# Altium PCB Sensor_Glove-X01.PcbDoc (part 3 of 4)
Units mm, origin at the board's own origin, x right, y up, seen from the top; angles counter-clockwise.
Board outline 58.67 x 37.59 mm, 2 copper layers (Top Layer, Bottom Layer), stack 1.711 mm thick; 126 components, 71 nets, 384 pads, 113 vias.
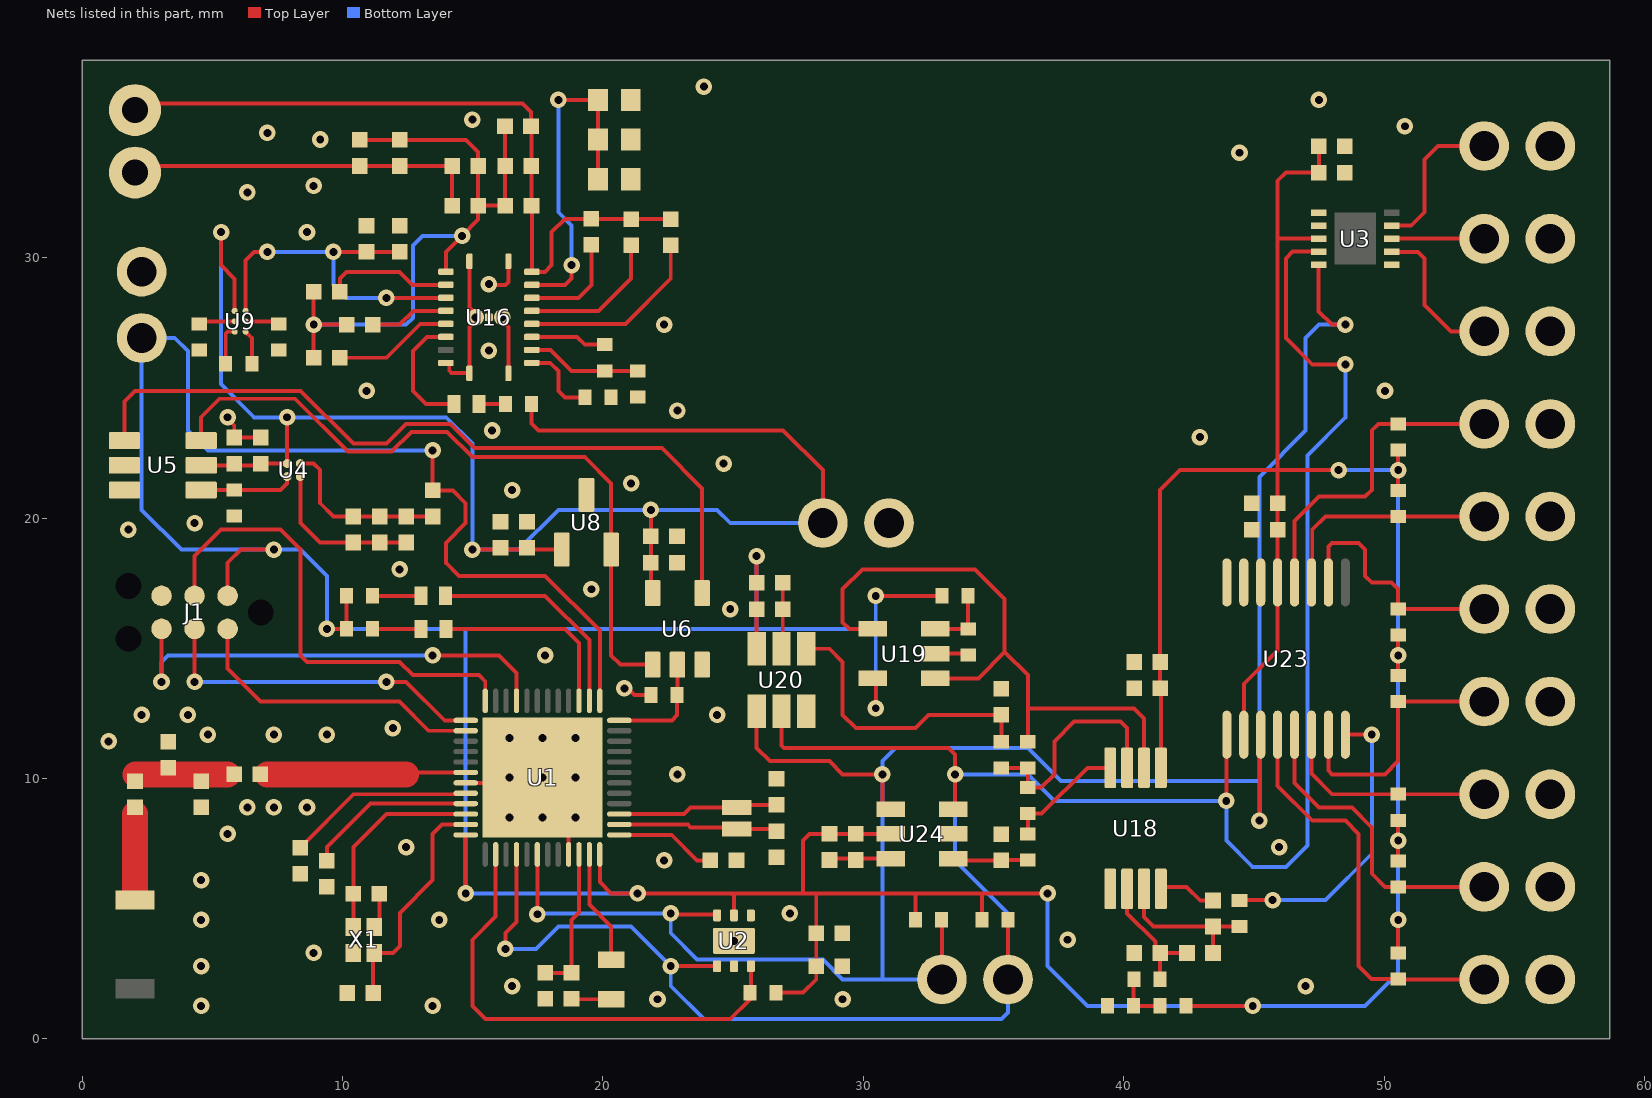
[diagram p2: the nets of this part, all layers, seen from the top]

## Part data (continued)
R24 R32 R36 R37: library part R-0402(1005), "Fixed Resistor, Metal Glaze/thick Film, 0.0625W, 0ohm, Surface Mount, 0402", Case Code (Imperial)=0402, Case Code (Metric)=1005, Manufacturer=Yageo, Manufacturer Part Number=AC0402JR-070RL, Max Operating Temperature=155°C, Max Power Dissipation=63mW, Min Operating Temperature=-55°C, Package Quantity=1, Power Rating=62.5mW, Resistor Type="Thick Film", Supplier Part Number 1=311-0.0LBCT-ND, Temperature Coefficient=200ppm/°C, Tolerance=5%, Voltage Rating=50V, Case/Package=0402, Category="Chip SMD Resistors", ComponentLink1Description=https://datasheet.ciiva.com:443/pdfs/VipMasterIC/IC/YAGO/YAGO-S-A0003597364/YAGO-S-A0003597364-1.pdf?src-supplier=IHS+Markit, ComponentLink1URL=https://datasheet.ciiva.com:443/pdfs/VipMasterIC/IC/YAGO/YAGO-S-A0003597364/YAGO-S-A0003597364-1.pdf?src-supplier=IHS+Markit, ComponentLink2Description=http://www.mouser.com/ds/2/447/yageodocoutput-1111992.pdf?src-supplier=Mouser, ComponentLink2URL=http://www.mouser.com/ds/2/447/yageodocoutput-1111992.pdf?src-supplier=Mouser, ComponentLink3Description=http://www.yageo.com/NewPortal/yageodocoutput?fileName=/pdf/R-Chip/PYu-AC_51_RoHS_L_6.pdf&src-supplier=Digi-Key, ComponentLink3URL=http://www.yageo.com/NewPortal/yageodocoutput?fileName=/pdf/R-Chip/PYu-AC_51_RoHS_L_6.pdf&src-supplier=Digi-Key, ComponentLink4Description=http://www.yageo.com/documents/recent/PYu-AC_51_RoHS_L_2_revised.pdf?src-supplier=Future+Electronics, ComponentLink4URL=http://www.yageo.com/documents/recent/PYu-AC_51_RoHS_L_2_revised.pdf?src-supplier=Future+Electronics, Features="Moisture Resistant,Automotive AEC-Q200,Anti-Sulfur", Height=0.015inch, Lead Free="Lead Free", Length=0.039inch, Number of Terminations=2, Packaging="Tape and Reel", Pricing 1="1=0.10000, 10=0.01900, 25=0.01400, 50=0.01080, 100=0.00790, 250=0.00604, 500=0.00482, 1000=0.00355, 5000=0.00255 (USD)", Resistance=0mR, RoHS=Yes, Stock 1=1100119, Supplier 1=Digi-Key, Termination=SMD/SMT, Width=0.02inch
R33 R35: library part R-0402(1005), "Fixed Resistor, Metal Glaze/thick Film, 0.0625W, 100000ohm, 50V, 1% +/-Tol, 100ppm/Cel, Surface Mount, 0402", Case Code (Imperial)=0402, Case Code (Metric)=1005, Manufacturer=Yageo, Manufacturer Part Number=AC0402FR-07100KL, Max Operating Temperature=155°C, Max Power Dissipation=63mW, Min Operating Temperature=-55°C, Power Rating=62.5mW, Resistor Type="Thick Film", Supplier Part Number 1=YAG3434CT-ND, Temperature Coefficient=100ppm/°C, Tolerance=1%, Voltage Rating=50V, Case/Package=0402, Category="Chip SMD Resistors", ComponentLink1Description=https://datasheet.ciiva.com:443/pdfs/VipMasterIC/IC/YAGO/YAGO-S-A0003597364/YAGO-S-A0003597364-1.pdf?src-supplier=IHS+Markit, ComponentLink1URL=https://datasheet.ciiva.com:443/pdfs/VipMasterIC/IC/YAGO/YAGO-S-A0003597364/YAGO-S-A0003597364-1.pdf?src-supplier=IHS+Markit, ComponentLink2Description=http://components.arrow.com/part/dataview/0323_03348509?src-supplier=Arrow+Europe, ComponentLink2URL=http://components.arrow.com/part/dataview/0323_03348509?src-supplier=Arrow+Europe, ComponentLink3Description=http://www.yageo.com/NewPortal/yageodocoutput?fileName=/pdf/R-Chip/PYu-AC_51_RoHS_L_6.pdf&src-supplier=Digi-Key, ComponentLink3URL=http://www.yageo.com/NewPortal/yageodocoutput?fileName=/pdf/R-Chip/PYu-AC_51_RoHS_L_6.pdf&src-supplier=Digi-Key, ComponentLink4Description=http://www.yageo.com/documents/recent/PYu-AC_51_RoHS_L_2.pdf?src-supplier=Mouser, ComponentLink4URL=http://www.yageo.com/documents/recent/PYu-AC_51_RoHS_L_2.pdf?src-supplier=Mouser, ComponentLink5Description=http://www.yageo.com/documents/recent/PYu-AC_51_RoHS_L_2_revised.pdf?src-supplier=Future+Electronics, ComponentLink5URL=http://www.yageo.com/documents/recent/PYu-AC_51_RoHS_L_2_revised.pdf?src-supplier=Future+Electronics, Depth=0.5mm, Features="Moisture Resistant,Automotive AEC-Q200", Height=0.015inch, Lead Free="Lead Free", Length=1mm, Military Standard=Not, Number of Terminations=2, Packaging="Tape and Reel", Pricing 1="1=0.10000, 10=0.02000, 100=0.00830, 1000=0.00374, 2500=0.00324, 5000=0.00268 (USD)", Resistance=100kR, RoHS=Yes, Stock 1=239006, Supplier 1=Digi-Key, Termination=SMD/SMT, Width=0.02inch
TP1 TP2 TP3 TP4 TP5 TP6 TP7 TP8 TP9 TP25 TP37 TP45: "SHUNT LP W/HANDLE 2 POS 30AU", Color=Black, Contact Current Rating=3A, Contact Resistance=15mR, Flammability Rating="UL94 V-0", Manufacturer="TE Connectivity", Manufacturer Part Number=8815452, Max Operating Temperature=105°C, Min Operating Temperature=-65°C, Package Quantity=14000, Supplier Part Number 1=A26242-ND, Approvals=UL,CSA, Category="Headers and Wire Housings", ComponentLink1Description=https://datasheet.ciiva.com/1455/92946-1455888.pdf?src-supplier=Newark, ComponentLink1URL=https://datasheet.ciiva.com/1455/92946-1455888.pdf?src-supplier=Newark, ComponentLink2Description=https://datasheet.ciiva.com/19459/841467-19459897.pdf?src-supplier=Jameco, ComponentLink2URL=https://datasheet.ciiva.com/19459/841467-19459897.pdf?src-supplier=Jameco, ComponentLink3Description=https://datasheet.ciiva.com/15174/getdatasheetpartid-155768-15174939.pdf?src-supplier=Verical, ComponentLink3URL=https://datasheet.ciiva.com/15174/getdatasheetpartid-155768-15174939.pdf?src-supplier=Verical, ComponentLink4Description=https://datasheet.ciiva.com/11754/0900766b80da19e8-11754990.pdf?src-supplier=RSComponents, ComponentLink4URL=https://datasheet.ciiva.com/11754/0900766b80da19e8-11754990.pdf?src-supplier=RSComponents, ComponentLink5Description=https://datasheet.ciiva.com/30154/eng-cs-1307819-section-6-7and8-0808-30154293.pdf?src-supplier=Onlinecomponents.com, ComponentLink5URL=https://datasheet.ciiva.com/30154/eng-cs-1307819-section-6-7and8-0808-30154293.pdf?src-supplier=Onlinecomponents.com, ComponentLink6Description=https://datasheet.ciiva.com/767/eng-cd-881545-k3-767850.pdf?src-supplier=Digi-Key, ComponentLink6URL=https://datasheet.ciiva.com/767/eng-cd-881545-k3-767850.pdf?src-supplier=Digi-Key, ComponentLink7Description=https://datasheet.ciiva.com/3120/eng-cs-1307819-section-6-7and8-0808-3120202.pdf?src-supplier=Avnet, ComponentLink7URL=https://datasheet.ciiva.com/3120/eng-cs-1307819-section-6-7and8-0808-3120202.pdf?src-supplier=Avnet, Contact Gender=Female, Contact Material=Bronze, Contact Plating=Gold, Current Rating=3A, Depth=10.9mm, Gender=Female, Height=10.9mm, Housing Color=Black, Housing Material=Thermoplastic, Length=5.08mm, Number of Contacts=2, Number of Positions=2, Number of Rows=1, Orientation=Straight, Packaging=Bag, Pitch=2.54mm, Pricing 1="1=0.280000, 10=0.262000, 25=0.223600, 50=0.195600, 100=0.181700, 250=0.160760, 500=0.153760, 1000=0.125800, 2500=0.115320 (USD)", Radiation Hardening=No, REACH SVHC="No SVHC", RoHS=Yes, Stock 1=2099, Supplier 1=Digi-Key, Termination=Solder, Width=2.5mm
U1: library part NRSC-NRF52832-QF-48, "Multiprotocol Bluetooth Smart, ANT/ANT+ and Proprietary System-on-Chip, 2.4 GHz, 256 KB FLASH, 1.7 to 3.6 V, -40 to 85 degC, 48-Pin QFN, RoHS, Tape and Reel", Current - Receiving=5.4mA, Current - Transmitting=7.5mA, Frequency=2.4GHz, Manufacturer="Nordic Semiconductor", Supplier Part Number 1=1490-1067-1-ND, Category="RF Receivers, Transceivers", ComponentLink1Description=https://datasheet.ciiva.com:443/pdfs/VipMasterIC/IC/NRSA/NRSA-S-A0002414264/NRSA-S-A0002414264-1.pdf?src-supplier=IHS+Markit, ComponentLink1URL=https://datasheet.ciiva.com:443/pdfs/VipMasterIC/IC/NRSA/NRSA-S-A0002414264/NRSA-S-A0002414264-1.pdf?src-supplier=IHS+Markit, ComponentLink5Description=http://infocenter.nordicsemi.com/pdf/nRF52832_PB_v1.7.pdf?src-supplier=Digi-Key, ComponentLink5URL=http://infocenter.nordicsemi.com/pdf/nRF52832_PB_v1.7.pdf?src-supplier=Digi-Key, ComponentLink6Description=http://infocenter.nordicsemi.com/pdf/nRF52832_PS_v1.4.pdf?src-supplier=Digi-Key, ComponentLink6URL=http://infocenter.nordicsemi.com/pdf/nRF52832_PS_v1.4.pdf?src-supplier=Digi-Key, Data Rate=2Mbps, Interface=SPI,UART, Manufacturer Part Number=NRF52832-QFAA-R7, Memory Size=64KB, Number of GPIO=32, Packaging="Tape and Reel", Pricing 1="1=5.46000, 10=4.87500, 25=4.38760, 100=3.99750, 250=3.60752, 500=3.23700 (USD)", RoHS=No, Sensitivity=-96dBm, Stock 1=7487, Supplier 1=Digi-Key
U2: library part bceab6869a9cb85cf5675529ee35ce4, "TEMPERATURE SENSOR", Ambient Temperature Range High=+150°C, Ambient Temperature Range Low=-55°C, Manufacturer="Texas Instruments", Max Operating Temperature=150°C, Max Supply Voltage=5.5V, Min Supply Voltage=1.8V, Operating Supply Current=3.5-16uA, Package=DRV0006A, Supplier Part Number 1=296-51834-1-ND, Temperature="-55°C to +150°C", Automotive=No, Category=IC, ComponentLink1Description=https://www.ti.com:443/lit/ds/symlink/tmp117.pdf?src-supplier=IHS+Markit, ComponentLink1URL=https://www.ti.com:443/lit/ds/symlink/tmp117.pdf?src-supplier=IHS+Markit, ComponentLink2Description=Datasheet, ComponentLink2URL=http://www.ti.com/lit/ds/symlink/tmp117.pdf, ComponentLink3Description=http://www.ti.com/lit/gpn/tmp117?src-supplier=Digi-Key, ComponentLink3URL=http://www.ti.com/lit/gpn/tmp117?src-supplier=Digi-Key, Device Class L1=Sensors, Device Class L2="Temperature and Humidity Sensors", Device Class L3=unset, Digikey Description="TEMPERATURE SENSOR", Height=0.8mm, Interface=I2C,2-Wire,SMBus, Ipc Land Pattern Name=DFN200X200X80-6, Lead Free=Yes, Manufacturer Part Number=TMP117AIDRVR, Max Junction Temp=+150°C, Min Operating Temperature=-55°C, Mount="Surface Mount", Octopart=https://octopart.com/tmp117aidrvr-texas+instruments-95511044, Output Type=I2C, Packaging="Cut Tape", Pricing 1="1=8.02000, 5=7.07600, 10=6.25000, 25=5.07040, 50=4.48100, 100=4.36300, 500=3.65552, 1000=3.41968 (USD)", Resolution=16bits, RoHS=TRUE, Standoff Height=0mm, Stock 1=3558, Supplier 1=Digi-Key, Temperature Range High=+150°C, Temperature Range Low=-55°C
U3: library part FDC1004, "Analog Circuit, 1 Func, 4 Channel, PDSO10", Manufacturer="Texas Instruments", Manufacturer Part Number=FDC1004DSCR, Max Operating Temperature=125°C, Min Operating Temperature=-40°C, Supplier Part Number 1=296-46090-1-ND, Category="Integrated Circuits (ICs)", ComponentLink1Description=https://www.ti.com:443/lit/ds/symlink/fdc1004.pdf?src-supplier=IHS+Markit, ComponentLink1URL=https://www.ti.com:443/lit/ds/symlink/fdc1004.pdf?src-supplier=IHS+Markit, ComponentLink2Description=https://datasheet.ciiva.com/48512/fdc1004-48512055.pdf?src-supplier=Avnet, ComponentLink2URL=https://datasheet.ciiva.com/48512/fdc1004-48512055.pdf?src-supplier=Avnet, Interface=I2C, Lead Free="Lead Free", Number of Inputs=4, Number of Pins=10, Packaging="Tape and Reel", Pricing 1="1=7.13000, 5=6.25000, 10=5.62500, 25=5.00000, 50=4.62500, 100=4.00000, 500=3.75000 (USD)", Radiation Hardening=No, RoHS=Yes, Stock 1=1027, Supplier 1=Digi-Key
U4: library part ADP160-3_3V, "Fixed Positive LDO Regulator, 3.3V, 0.195V Dropout, CMOS, PBGA4", Dropout Voltage=105mV, Manufacturer="Analog Devices", Manufacturer Part Number=ADP160ACBZ-3.3-R7, Max Input Voltage=5.5V, Max Operating Temperature=125°C, Max Output Current=150mA, Max Output Voltage=4.2V, Max Supply Current=42uA, Min Current Limit=220mA, Min Input Voltage=2.2V, Min Operating Temperature=-40°C, Min Output Voltage=1.2V, Nominal Output Voltage=3.3V, Output Voltage Accuracy=2%, Package Quantity=3000, Power Supply Rejection Ratio (PSRR)=60dB, Supplier Part Number 1=ADP160ACBZ-3.3-R7CT-ND, Accuracy=2%, Category="Voltage Regulators - Linear", ComponentLink1Description=https://datasheet.ciiva.com:443/pdfs/VipMasterIC/IC/ANDI/ANDI-S-A0005865400/ANDI-S-A0005865400-1.pdf?src-supplier=IHS+Markit, ComponentLink1URL=https://datasheet.ciiva.com:443/pdfs/VipMasterIC/IC/ANDI/ANDI-S-A0005865400/ANDI-S-A0005865400-1.pdf?src-supplier=IHS+Markit, ComponentLink2Description=https://datasheet.ciiva.com/15271/adp160-161-162-163-15271721.pdf?src-supplier=Arrow+Europe, ComponentLink2URL=https://datasheet.ciiva.com/15271/adp160-161-162-163-15271721.pdf?src-supplier=Arrow+Europe, ComponentLink3Description=https://datasheet.ciiva.com/8242/adp160-161-162-163-8242024.pdf?src-supplier=Avnet, ComponentLink3URL=https://datasheet.ciiva.com/8242/adp160-161-162-163-8242024.pdf?src-supplier=Avnet, ComponentLink4Description=https://datasheet.ciiva.com/18552/adp160-161-162-163-18552347.pdf?src-supplier=Digi-Key, ComponentLink4URL=https://datasheet.ciiva.com/18552/adp160-161-162-163-18552347.pdf?src-supplier=Digi-Key, ComponentLink5Description=https://datasheet.ciiva.com/18552/adp160-161-162-163-18552348.pdf?src-supplier=Digi-Key, ComponentLink5URL=https://datasheet.ciiva.com/18552/adp160-161-162-163-18552348.pdf?src-supplier=Digi-Key, ComponentLink6Description=https://datasheet.ciiva.com/18552/adp160-161-162-163-18552349.pdf?src-supplier=Digi-Key, ComponentLink6URL=https://datasheet.ciiva.com/18552/adp160-161-162-163-18552349.pdf?src-supplier=Digi-Key, Lead Free="Contains Lead", Mount="Surface Mount", Nominal Supply Current=42uA, Number of Outputs=1, Number of Pins=4, Number of Regulators=1, Operating Supply Current=42uA, Output Current=150mA, Output Type=Fixed, Output Voltage=3.3V, Packaging="Tape and Reel", Polarity=Positive, Pricing 1="1=1.12000, 10=1.00300, 25=0.95200, 100=0.73100, 250=0.64600, 500=0.61200, 1000=0.49300 (USD)", Radiation Hardening=No, REACH SVHC="No SVHC", RoHS=Yes, Supplier 1=Digi-Key
U5: library part CMP-0859-00228-3, "CONFIGURABLE MULTIPLE-FUNCTION GATE, DBV0006A, LARGE T&R", Case/Package=SOT-23, High Level Output Current=-32mA, Low Level Output Current=32mA, Manufacturer="Texas Instruments", Max Operating Temperature=125°C, Max Supply Voltage=5.5V, Min Operating Temperature=-40°C, Min Supply Voltage=1.65V, Package Quantity=3000, Quiescent Current=10uA, Supplier Part Number 1=296-15574-1-ND, Category="Logic Gates", ComponentLink1Description=https://www.ti.com:443/lit/ds/symlink/sn74lvc1g57.pdf?src-supplier=IHS+Markit, ComponentLink1URL=https://www.ti.com:443/lit/ds/symlink/sn74lvc1g57.pdf?src-supplier=IHS+Markit, ComponentLink2Description=https://datasheet.ciiva.com/15090/getdatasheetpartid-173082-15090973.pdf?src-supplier=Verical, ComponentLink2URL=https://datasheet.ciiva.com/15090/getdatasheetpartid-173082-15090973.pdf?src-supplier=Verical, ComponentLink3Description=https://datasheet.ciiva.com/1880/sn74lvc1g57-1880083.pdf?src-supplier=Digi-Key, ComponentLink3URL=https://datasheet.ciiva.com/1880/sn74lvc1g57-1880083.pdf?src-supplier=Digi-Key, ComponentLink4Description=https://datasheet.ciiva.com/1880/sn74lvc1g57-1880084.pdf?src-supplier=Digi-Key, ComponentLink4URL=https://datasheet.ciiva.com/1880/sn74lvc1g57-1880084.pdf?src-supplier=Digi-Key, ComponentLink5Description=https://datasheet.ciiva.com/46395/1882763-46395382.pdf?src-supplier=Element14, ComponentLink5URL=https://datasheet.ciiva.com/46395/1882763-46395382.pdf?src-supplier=Element14, ComponentLink6Description=https://datasheet.ciiva.com/46439/1834192-46439175.pdf?src-supplier=Element14, ComponentLink6URL=https://datasheet.ciiva.com/46439/1834192-46439175.pdf?src-supplier=Element14, ComponentLink7Description=https://datasheet.ciiva.com/7783/1771418-7783483.pdf?src-supplier=Element14, ComponentLink7URL=https://datasheet.ciiva.com/7783/1771418-7783483.pdf?src-supplier=Element14, ComponentLink8Description=https://datasheet.ciiva.com/7783/1771418-7783484.pdf?src-supplier=Element14, ComponentLink8URL=https://datasheet.ciiva.com/7783/1771418-7783484.pdf?src-supplier=Element14, ComponentLink9Description=https://datasheet.ciiva.com/1880/sn74lvc1g57-1880082.pdf?src-supplier=Digi-Key, ComponentLink9URL=https://datasheet.ciiva.com/1880/sn74lvc1g57-1880082.pdf?src-supplier=Digi-Key, ComponentLink10Description=https://datasheet.ciiva.com/48702/001075107-da-01-en-ic-mult-fun-sn74lvc1g57dbvr-sot-23-6-tid-48702374.pdf?src-supplier=Conrad, ComponentLink10URL=https://datasheet.ciiva.com/48702/001075107-da-01-en-ic-mult-fun-sn74lvc1g57dbvr-sot-23-6-tid-48702374.pdf?src-supplier=Conrad, Contact Plating=Gold, Height=1.3mm, Lead Free="Lead Free", Length=3.05mm, Logic Function="NAND GATE,AND GATE,NOR GATE,OR GATE,Inverter,Multi Function", Manufacturer Part Number=SN74LVC1G57DBVR, Max Output Current=32mA, Mount="Surface Mount", Number of Bits=1, Number of Circuits=1, Number of Elements=1, Number of Gates=1, Number of Input Lines=2, Number of Inputs=3, Number of Output Lines=1, Number of Outputs=1, Number of Pins=6, Output Current=32mA, Packaging="Tape and Reel", Pricing 1="1=0.37000, 10=0.28100, 25=0.25320, 100=0.17480, 250=0.14720, 500=0.11960, 1000=0.09200 (USD)", Propagation Delay=6.3ns, Radiation Hardening=No, REACH SVHC="No SVHC", RoHS=Yes, Schmitt Trigger Input=Yes, Stock 1=11185, Supplier 1=Digi-Key, Termination=SMD/SMT, Turn-On Delay Time=6.1ns, Weight=0.000229oz, Width=1.75mm
U6: library part CMP-0859-00176-3, "Single Positive-Edge-Triggered D-Type Flip-Flop, DBV0005A, LARGE T&R", Case/Package=SOT-23, Frequency=160MHz, High Level Output Current=-32mA, Low Level Output Current=32mA, Manufacturer="Texas Instruments", Max Operating Temperature=125°C, Max Supply Voltage=5.5V, Min Operating Temperature=-40°C, Min Supply Voltage=1.65V, Package Quantity=3000, Supplier Part Number 1=296-9851-1-ND, Category="Latches and Flip Flops", Clock Edge Trigger Type="Positive Edge", ComponentLink1Description=https://www.ti.com:443/lit/ds/symlink/sn74lvc1g80.pdf?src-supplier=IHS+Markit, ComponentLink1URL=https://www.ti.com:443/lit/ds/symlink/sn74lvc1g80.pdf?src-supplier=IHS+Markit, ComponentLink2Description=https://datasheet.ciiva.com/15091/getdatasheetpartid-71921-15091286.pdf?src-supplier=Verical, ComponentLink2URL=https://datasheet.ciiva.com/15091/getdatasheetpartid-71921-15091286.pdf?src-supplier=Verical, ComponentLink3Description=https://datasheet.ciiva.com/1854/sn74lvc1g80-1854761.pdf?src-supplier=Digi-Key, ComponentLink3URL=https://datasheet.ciiva.com/1854/sn74lvc1g80-1854761.pdf?src-supplier=Digi-Key, ComponentLink4Description=https://datasheet.ciiva.com/46395/1882705-46395835.pdf?src-supplier=Element14, ComponentLink4URL=https://datasheet.ciiva.com/46395/1882705-46395835.pdf?src-supplier=Element14, ComponentLink5Description=https://datasheet.ciiva.com/1854/sn74lvc1g80-1854762.pdf?src-supplier=Digi-Key, ComponentLink5URL=https://datasheet.ciiva.com/1854/sn74lvc1g80-1854762.pdf?src-supplier=Digi-Key, ComponentLink6Description=https://datasheet.ciiva.com/8055/1831218-8055610.pdf?src-supplier=Element14, ComponentLink6URL=https://datasheet.ciiva.com/8055/1831218-8055610.pdf?src-supplier=Element14, ComponentLink7Description=https://datasheet.ciiva.com/1854/sn74lvc1g80-1854763.pdf?src-supplier=Digi-Key, ComponentLink7URL=https://datasheet.ciiva.com/1854/sn74lvc1g80-1854763.pdf?src-supplier=Digi-Key, Lead Free="Lead Free", Logic Function=D-Type,Flip-Flop, Manufacturer Part Number=SN74LVC1G80DBVR, Max Frequency=160MHz, Mount="Surface Mount", Number of Bits=1, Number of Bits per Element=1, Number of Circuits=1, Number of Elements=1, Number of Gates=1, Number of Input Lines=1, Number of Output Lines=1, Number of Pins=5, Output Current=32mA, Packaging="Tape and Reel", Polarity=Inverting, Pricing 1="1=0.32000, 10=0.24000, 25=0.21000, 100=0.13590, 250=0.11252, 500=0.09000, 1000=0.06900 (USD)", Propagation Delay=9.9ns, Radiation Hardening=No, REACH SVHC="No SVHC", RoHS=Yes, Stock 1=12348, Supplier 1=Digi-Key, Turn-On Delay Time=1.1ns, Weight=0.000557oz
U8: library part CMP-04937-000003-1, "LP HALL 32FBDBZR", Case/Package=TO-236-3, Manufacturer="Texas Instruments", Max Operating Temperature=85°C, Max Output Current=5mA, Max Supply Current=2.6mA, Min Operating Temperature=-40°C, Supplier Part Number 1=296-47323-1-ND, Category="Integrated Circuits (ICs)", ComponentLink1Description=https://www.ti.com:443/lit/ds/symlink/drv5032.pdf?src-supplier=IHS+Markit, ComponentLink1URL=https://www.ti.com:443/lit/ds/symlink/drv5032.pdf?src-supplier=IHS+Markit, ComponentLink2Description=Datasheet, ComponentLink2URL=http://www.ti.com/lit/ds/symlink/drv5032.pdf, ComponentLink3Description=http://www.ti.com/lit/ds/symlink/drv5032.pdf?src-supplier=Digi-Key, ComponentLink3URL=http://www.ti.com/lit/ds/symlink/drv5032.pdf?src-supplier=Digi-Key, ComponentLink4Description=http://www.ti.com/general/docs/suppproductinfo.tsp?distId=10&amp;gotoUrl=http%3A%2F%2Fwww.ti.com%2Flit%2Fgpn%2Fdrv5032&src-supplier=Digi-Key, ComponentLink4URL=http://www.ti.com/general/docs/suppproductinfo.tsp?distId=10&amp;gotoUrl=http%3A%2F%2Fwww.ti.com%2Flit%2Fgpn%2Fdrv5032&src-supplier=Digi-Key, Manufacturer Part Number=DRV5032FBDBZR, Packaging="Cut Tape", Pricing 1="1=0.80000, 5=0.76600, 10=0.66600, 25=0.58520, 50=0.48600, 100=0.41400, 500=0.36000, 1000=0.31500 (USD)", RoHS=No, Sensing Method="Hall Effect", Stock 1=6326, Supplier 1=Digi-Key
U9: "Power Supply Support Circuit", Battery Pack Voltage=4.2V, Manufacturer="Texas Instruments", Max Charge Current=250mA, Max Operating Temperature=85°C, Max Supply Voltage=6.45V, Min Operating Temperature=-40°C, Min Supply Voltage=3.5V, Operating Supply Current=75nA, Output Voltage=4.35V, Package Quantity=250, Supplier Part Number 1=296-38373-1-ND, Category="Batteries and Accessories", ComponentLink1Description=https://www.ti.com:443/lit/ds/symlink/bq25100.pdf?src-supplier=IHS+Markit, ComponentLink1URL=https://www.ti.com:443/lit/ds/symlink/bq25100.pdf?src-supplier=IHS+Markit, ComponentLink2Description=https://datasheet.ciiva.com/46404/1854517-46404758.pdf?src-supplier=Element14, ComponentLink2URL=https://datasheet.ciiva.com/46404/1854517-46404758.pdf?src-supplier=Element14, Contact Plating=Copper,Tin,Silver, Fault Protection="Over Voltage,Over Temperature,Short Circuit", Lead Free="Lead Free", Manufacturer Part Number=BQ25100YFPT, Mount="Surface Mount", Number of Cells=1, Number of Pins=6, Output Current=250mA, Packaging="Tape and Reel", Pricing 1="1=2.24000, 10=2.01100, 25=1.89760, 100=1.51800 (USD)", REACH SVHC="No SVHC", RoHS=Yes, Stock 1=3049, Supplier 1=Digi-Key, Weight=6E-05oz
U16: library part TI-BQ51013B-RHL20, "WPC 1.1 Compatible Fully Integrated Wireless Power Receiver IC, 4 V Min Input, 20-pin VQFN (RHL), Green (RoHS & no Sb/Br)", Case/Package=VQFN, Manufacturer="Texas Instruments", Max Operating Temperature=125°C, Min Operating Temperature=0°C, Operating Supply Current=8mA, Output Current=1.5A, Output Voltage=5V, Package Quantity=3000, Supplier Part Number 1=296-38885-1-ND, Category="Power Management ICs", ComponentLink1Description=https://www.ti.com:443/lit/ds/symlink/bq51013b.pdf?src-supplier=IHS+Markit, ComponentLink1URL=https://www.ti.com:443/lit/ds/symlink/bq51013b.pdf?src-supplier=IHS+Markit, ComponentLink2Description=https://datasheet.ciiva.com/6601/bq51013b-6601292.pdf?src-supplier=Digi-Key, ComponentLink2URL=https://datasheet.ciiva.com/6601/bq51013b-6601292.pdf?src-supplier=Digi-Key, Contact Plating=Gold, Lead Free="Lead Free", Logic Function=Receiver, Manufacturer Part Number=BQ51013BRHLR, Mount="Surface Mount", Number of Pins=20, Packaging="Tape and Reel", Pricing 1="1=3.33000, 10=2.97000, 25=2.67320, 100=2.43540, 250=2.19780, 500=1.97208, 1000=1.66320 (USD)", RoHS=Yes, Stock 1=8882, Supplier 1=Digi-Key
U18: library part AD8237, "Instrumentation Amplifier, 1 Func, 75uV Offset-Max, 0.2MHz Band Width, CMOS, PDSO8", Case/Package=MSOP, Input Bias Current=250pA, Input Offset Voltage (Vos)=75uV, Manufacturer="Analog Devices", Manufacturer Part Number=AD8237ARMZ-R7, Max Operating Temperature=125°C, Max Supply Voltage=5.5V, Min Operating Temperature=-40°C, Min Supply Voltage=1.8V, Nominal Supply Current=115uA, Output Current per Channel=4mA, Package Quantity=1, Supplier Part Number 1=AD8237ARMZ-R7CT-ND, Voltage Gain=60dB, -3db Bandwidth=200kHz, Bandwidth=20kHz, Category="Amplifiers - Op Amps, Buffer, Instrumentation", Common Mode Rejection Ratio=106dB, ComponentLink1Description=https://datasheet.ciiva.com:443/pdfs/VipMasterIC/IC/ANDI/ANDIS13412/ANDIS13412-1.pdf?src-supplier=IHS+Markit, ComponentLink1URL=https://datasheet.ciiva.com:443/pdfs/VipMasterIC/IC/ANDI/ANDIS13412/ANDIS13412-1.pdf?src-supplier=IHS+Markit, ComponentLink2Description=https://datasheet.ciiva.com/6626/ad8237-6626733.pdf?src-supplier=Digi-Key, ComponentLink2URL=https://datasheet.ciiva.com/6626/ad8237-6626733.pdf?src-supplier=Digi-Key, ComponentLink3Description=https://datasheet.ciiva.com/8582/ad8237-8582303.pdf?src-supplier=Avnet, ComponentLink3URL=https://datasheet.ciiva.com/8582/ad8237-8582303.pdf?src-supplier=Avnet, Contact Plating=Tin,Matte, Lead Free="Contains Lead", Mount="Surface Mount", Number of Channels=1, Number of Circuits=1, Number of Elements=1, Number of Pins=8, Operating Supply Current=115uA, Packaging="Tape and Reel", Pricing 1="1=2.68000, 10=2.40400, 25=2.27240, 100=1.86850, 250=1.67660, 500=1.61600 (USD)", RoHS=Yes, Slew Rate=0.15V/µs, Stock 1=18084, Supplier 1=Digi-Key
U19: library part CMP-0384-01459-1, "Single Channel Rail-to-Rail Operational Amplifier, 95 Hz BW, 13 mV/us SR, Industrial, 5-pin SOT23 (RJ-5), Reel", Case/Package=SOT-23-5, Input Bias Current=1pA, Input Capacitance=4.2pF, Input Offset Voltage (Vos)=2.5mV, Manufacturer="Analog Devices", Max Dual Supply Voltage=2.5V, Max Operating Temperature=125°C, Max Supply Voltage=5V, Min Dual Supply Voltage=900mV, Min Operating Temperature=-40°C, Min Supply Voltage=1.8V, Operating Supply Current=25.5uA, Operating Supply Voltage=3V, Output Current per Channel=45mA, Package Quantity=3000, Power Supply Rejection Ratio (PSRR)=110dB, Supplier Part Number 1=AD8505ARJZ-R7CT-ND, Voltage Gain=120dB, Bandwidth=95kHz, Category="Amplifiers - Op Amps, Buffer, Instrumentation", Common Mode Rejection Ratio=90dB, ComponentLink1Description=https://datasheet.ciiva.com:443/pdfs/VipMasterIC/IC/ANDI/ANDI-S-A0003407821/ANDI-S-A0003407815-1.pdf?src-supplier=IHS+Markit, ComponentLink1URL=https://datasheet.ciiva.com:443/pdfs/VipMasterIC/IC/ANDI/ANDI-S-A0003407821/ANDI-S-A0003407815-1.pdf?src-supplier=IHS+Markit, ComponentLink2Description=https://datasheet.ciiva.com/22712/1610834-22712017.pdf?src-supplier=Element14, ComponentLink2URL=https://datasheet.ciiva.com/22712/1610834-22712017.pdf?src-supplier=Element14, ComponentLink3Description=https://datasheet.ciiva.com/11711/ad8505-8506-8508-11711719.pdf?src-supplier=Avnet, ComponentLink3URL=https://datasheet.ciiva.com/11711/ad8505-8506-8508-11711719.pdf?src-supplier=Avnet, ComponentLink4Description=https://datasheet.ciiva.com/1135/1610834-1135532.pdf?src-supplier=Element14, ComponentLink4URL=https://datasheet.ciiva.com/1135/1610834-1135532.pdf?src-supplier=Element14, Contact Plating=Tin,Matte, Gain Bandwidth Product=95kHz, Lead Free="Contains Lead", Manufacturer Part Number=AD8505ARJZ-R7, Number of Amplifiers=1, Number of Channels=1, Number of Circuits=1, Number of Elements=1, Number of Pins=5, Packaging="Tape and Reel", Pricing 1="1=1.55000, 10=1.38700, 25=1.31600, 100=1.01050, 250=0.89300, 500=0.84600, 1000=0.68150 (USD)", Quiescent Current=25.5uA, REACH SVHC="No SVHC", RoHS=Yes, Slew Rate=0.013V/µs, Stock 1=2044, Supplier 1=Digi-Key, Unity Gain Bandwidth Product=95kHz
U20: library part CMP-0004-00333-1, "Low-Power, 8-Bit DAC with High-Speed I2C Input, -40 to 105 degC, 6-pin SOT23 (DBV6), Green (RoHS & no Sb/Br)", Case/Package=SOT-23, Manufacturer="Texas Instruments", Max Operating Temperature=105°C, Max Supply Voltage=5.5V, Min Operating Temperature=-40°C, Min Supply Voltage=2.7V, Nominal Supply Current=155uA, Operating Supply Voltage=5V, Package Quantity=250, Power Consumption=400uW, Supplier Part Number 1=296-17199-1-ND, Category="Digital to Analog Converters (DACs)", ComponentLink1Description=https://www.ti.com:443/lit/ds/symlink/dac5571.pdf?src-supplier=IHS+Markit, ComponentLink1URL=https://www.ti.com:443/lit/ds/symlink/dac5571.pdf?src-supplier=IHS+Markit, ComponentLink2Description=https://datasheet.ciiva.com/15146/getdatasheetpartid-184785-15146834.pdf?src-supplier=Verical, ComponentLink2URL=https://datasheet.ciiva.com/15146/getdatasheetpartid-184785-15146834.pdf?src-supplier=Verical, ComponentLink3Description=https://datasheet.ciiva.com/1597/dac5571-1597245.pdf?src-supplier=Newark, ComponentLink3URL=https://datasheet.ciiva.com/1597/dac5571-1597245.pdf?src-supplier=Newark, ComponentLink4Description=https://datasheet.ciiva.com/34302/1337393-34302226.pdf?src-supplier=Jameco, ComponentLink4URL=https://datasheet.ciiva.com/34302/1337393-34302226.pdf?src-supplier=Jameco, ComponentLink5Description=https://datasheet.ciiva.com/4779/slas405a-117423-4779268.pdf?src-supplier=Mouser, ComponentLink5URL=https://datasheet.ciiva.com/4779/slas405a-117423-4779268.pdf?src-supplier=Mouser, ComponentLink6Description=https://datasheet.ciiva.com/41460/001186519-da-01-en-8-bit-12c-single-dac5571idbvt-sot-23-tid-41460679.pdf?src-supplier=Conrad, ComponentLink6URL=https://datasheet.ciiva.com/41460/001186519-da-01-en-8-bit-12c-single-dac5571idbvt-sot-23-tid-41460679.pdf?src-supplier=Conrad, ComponentLink7Description=https://datasheet.ciiva.com/26235/dac5571-26235157.pdf?src-supplier=Avnet+Europe, ComponentLink7URL=https://datasheet.ciiva.com/26235/dac5571-26235157.pdf?src-supplier=Avnet+Europe, ComponentLink8Description=https://datasheet.ciiva.com/1362/dac5571-1362876.pdf?src-supplier=Digi-Key, ComponentLink8URL=https://datasheet.ciiva.com/1362/dac5571-1362876.pdf?src-supplier=Digi-Key, ComponentLink9Description=https://datasheet.ciiva.com/1362/dac5571-1362877.pdf?src-supplier=Digi-Key, ComponentLink9URL=https://datasheet.ciiva.com/1362/dac5571-1362877.pdf?src-supplier=Digi-Key, ComponentLink10Description=https://datasheet.ciiva.com/1362/dac5571-1362878.pdf?src-supplier=Digi-Key, ComponentLink10URL=https://datasheet.ciiva.com/1362/dac5571-1362878.pdf?src-supplier=Digi-Key, ComponentLink11Description=https://datasheet.ciiva.com/3040/dac5571-3040451.pdf?src-supplier=Avnet, ComponentLink11URL=https://datasheet.ciiva.com/3040/dac5571-3040451.pdf?src-supplier=Avnet, ComponentLink12Description=https://datasheet.ciiva.com/3040/dac5571-3040452.pdf?src-supplier=Avnet, ComponentLink12URL=https://datasheet.ciiva.com/3040/dac5571-3040452.pdf?src-supplier=Avnet, ComponentLink13Description=https://datasheet.ciiva.com/46430/1762718-46430597.pdf?src-supplier=Element14, ComponentLink13URL=https://datasheet.ciiva.com/46430/1762718-46430597.pdf?src-supplier=Element14, Contact Plating=Gold, Conversion Rate=188KS/s, Differential Nonlinearity=0.25LSB, Height=1.15mm, Integral Nonlinearity (INL)=1LSB, Interface=I2C, Lead Free="Lead Free", Length=2.9mm, Manufacturer Part Number=DAC5571IDBVT, Number of Bits=8, Number of Channels=1, Number of Converters=1, Number of DAC Channels=1, Number of Pins=6, Operating Supply Current=155uA, Output Type=Voltage, Packaging="Tape and Reel", Polarity=Unipolar, Pricing 1="1=1.49000, 10=1.34100, 25=1.26520, 100=1.01200 (USD)", Radiation Hardening=No, REACH SVHC="No SVHC", Resolution=8b, RoHS=Yes, Sampling Rate=188KS/s, Settling Time=8us, Stock 1=4888, Supplier 1=Digi-Key, Supply Type=Single, Weight=0.00127oz, Width=1.6mm
U23: library part CMP-0798-00197-1, "CMOS, Low Voltage, 2-Wire Serially Controlled, Matrix Switch, -40 to 85 degC, 16-pin SOP (RU-16), Tube", Case/Package=TSSOP, Drain to Source Resistance=2.5R, High Level Output Current=120mA, Manufacturer="Analog Devices", Max Operating Temperature=85°C, Max Power Dissipation=100uW, Max Supply Current=20uA, Max Supply Voltage=5.5V, Min Operating Temperature=-40°C, Min Supply Voltage=2.7V, On-State Resistance=4.5R, Operating Supply Current=10uA, Package Quantity=96, Supplier Part Number 1=ADG728BRUZ-ND, -3db Bandwidth=65MHz, Bandwidth=65MHz, Category="Decoders and Multiplexers", ComponentLink1Description=https://datasheet.ciiva.com:443/pdfs/VipMasterIC/IC/ANDI/ANDIS13257/ANDIS13257-1.pdf?src-supplier=IHS+Markit, ComponentLink1URL=https://datasheet.ciiva.com:443/pdfs/VipMasterIC/IC/ANDI/ANDIS13257/ANDIS13257-1.pdf?src-supplier=IHS+Markit, ComponentLink2Description=https://datasheet.ciiva.com/1171/1610644-1171108.pdf?src-supplier=Element14, ComponentLink2URL=https://datasheet.ciiva.com/1171/1610644-1171108.pdf?src-supplier=Element14, ComponentLink3Description=https://datasheet.ciiva.com/5797/adg728-729-5797207.pdf?src-supplier=Farnell, ComponentLink3URL=https://datasheet.ciiva.com/5797/adg728-729-5797207.pdf?src-supplier=Farnell, ComponentLink4Description=https://datasheet.ciiva.com/1668/adg728-729-1668904.pdf?src-supplier=Digi-Key, ComponentLink4URL=https://datasheet.ciiva.com/1668/adg728-729-1668904.pdf?src-supplier=Digi-Key, ComponentLink5Description=https://datasheet.ciiva.com/2978/adg728-729-2978667.pdf?src-supplier=Avnet, ComponentLink5URL=https://datasheet.ciiva.com/2978/adg728-729-2978667.pdf?src-supplier=Avnet, ComponentLink6Description=https://datasheet.ciiva.com/7986/adg728-729-7986413.pdf?src-supplier=Element14, ComponentLink6URL=https://datasheet.ciiva.com/7986/adg728-729-7986413.pdf?src-supplier=Element14, ComponentLink7Description=https://datasheet.ciiva.com/48708/001248036-da-01-en-ic-mux-demux-8x1-adg728bruz-tssop-16-adi-48708636.pdf?src-supplier=Conrad, ComponentLink7URL=https://datasheet.ciiva.com/48708/001248036-da-01-en-ic-mux-demux-8x1-adg728bruz-tssop-16-adi-48708636.pdf?src-supplier=Conrad, Contact Plating=Tin,Matte, Height=1.05mm, Interface=Serial,2-Wire, Lead Free="Contains Lead", Length=5mm, Manufacturer Part Number=ADG728BRUZ, Nominal Supply Current=20uA, Number of Bits=8, Number of Channels=1, Number of Circuits=1, Number of Inputs=8, Number of Outputs=1, Number of Pins=16, Packaging=Rail/Tube, Pricing 1="1=5.54000, 10=4.97400, 25=4.70240, 100=3.86650, 250=3.46940, 500=3.34400, 1000=3.03050 (USD)", Radiation Hardening=No, REACH SVHC="No SVHC", RoHS=Yes, Stock 1=1351, Supplier 1=Digi-Key, Throw Configuration=DPST, Turn-Off Delay Time=85ns, Turn-On Delay Time=95ns, Width=4.4mm
U24: library part CMP-0003-00255-2, "Self-Calibrating, 16-Bit ADC, -40 to 85 degC, 6-pin SOT23 (DBV6), Green (RoHS & no Sb/Br)", Case/Package=SOT-23, Manufacturer="Texas Instruments", Max Operating Temperature=85°C, Max Power Dissipation=750uW, Max Supply Voltage=5.5V, Min Operating Temperature=-40°C, Min Supply Voltage=2.7V, Nominal Supply Current=90uA, Operating Supply Voltage=5V, Package Quantity=250, Supplier Part Number 1=296-14298-1-ND, Category="Analog to Digital Converters (ADCs)", ComponentLink1Description=https://www.ti.com:443/lit/ds/symlink/ads1100.pdf?src-supplier=IHS+Markit, ComponentLink1URL=https://www.ti.com:443/lit/ds/symlink/ads1100.pdf?src-supplier=IHS+Markit, ComponentLink2Description=https://datasheet.ciiva.com/7226/70865-7226785.pdf?src-supplier=Newark, ComponentLink2URL=https://datasheet.ciiva.com/7226/70865-7226785.pdf?src-supplier=Newark, ComponentLink3Description=https://datasheet.ciiva.com/26943/getdatasheetpartid-228526-26943613.pdf?src-supplier=Verical, ComponentLink3URL=https://datasheet.ciiva.com/26943/getdatasheetpartid-228526-26943613.pdf?src-supplier=Verical, ComponentLink4Description=https://datasheet.ciiva.com/26797/ads1100a1idbvt-26797549.pdf?src-supplier=IIIC, ComponentLink4URL=https://datasheet.ciiva.com/26797/ads1100a1idbvt-26797549.pdf?src-supplier=IIIC, ComponentLink5Description=https://datasheet.ciiva.com/1261/ads1100-1261111.pdf?src-supplier=Digi-Key, ComponentLink5URL=https://datasheet.ciiva.com/1261/ads1100-1261111.pdf?src-supplier=Digi-Key, ComponentLink6Description=https://datasheet.ciiva.com/3038/sbas239b-3038715.pdf?src-supplier=Avnet, ComponentLink6URL=https://datasheet.ciiva.com/3038/sbas239b-3038715.pdf?src-supplier=Avnet, ComponentLink7Description=https://datasheet.ciiva.com/1261/ads1100-1261110.pdf?src-supplier=Digi-Key, ComponentLink7URL=https://datasheet.ciiva.com/1261/ads1100-1261110.pdf?src-supplier=Digi-Key, ComponentLink8Description=https://datasheet.ciiva.com/26236/sbas239b-26236358.pdf?src-supplier=Avnet+Europe, ComponentLink8URL=https://datasheet.ciiva.com/26236/sbas239b-26236358.pdf?src-supplier=Avnet+Europe, ComponentLink9Description=https://datasheet.ciiva.com/1261/ads1100-1261112.pdf?src-supplier=Digi-Key, ComponentLink9URL=https://datasheet.ciiva.com/1261/ads1100-1261112.pdf?src-supplier=Digi-Key, ComponentLink10Description=https://datasheet.ciiva.com/22696/1882275-22696410.pdf?src-supplier=Element14, ComponentLink10URL=https://datasheet.ciiva.com/22696/1882275-22696410.pdf?src-supplier=Element14, ComponentLink11Description=https://datasheet.ciiva.com/3038/sbas239b-3038716.pdf?src-supplier=Avnet, ComponentLink11URL=https://datasheet.ciiva.com/3038/sbas239b-3038716.pdf?src-supplier=Avnet, Contact Plating=Gold, Conversion Rate=128S/s, Differential Nonlinearity=1LSB, Height=1.15mm, Interface=I2C, Lead Free="Lead Free", Length=2.9mm, Manufacturer Part Number=ADS1100A1IDBVT, Max Supply Voltage (DC)=5.5V, Min Supply Voltage (DC)=2.7V, Number of A/D Converters=1, Number of Analog Inputs=1, Number of Bits=16, Number of Channels=1, Number of Converters=1, Number of Elements=1, Number of Inputs=1, Number of Pins=6, Packaging="Tape and Reel", Polarity=Bipolar, Power Dissipation=750uW, Pricing 1="1=5.33000, 10=4.79100, 25=4.52920, 100=3.72410 (USD)", Radiation Hardening=No, REACH SVHC="No SVHC", Resolution=16b, RoHS=Yes, Sampling Rate=128S/s, Stock 1=376, Supplier 1=Digi-Key, Supply Type=Single, Width=1.6mm
X1: library part CRYSTAL_32MHz, "Parallel - Fundamental Quartz Crystal, 32MHz Nom", Case/Package=SMD/SMT, ESR (Equivalent Series Resistance)=80R, Frequency Stability=10ppm, Load Capacitance=8pF, Manufacturer=Diodes, Manufacturer Part Number=US3200005Z, Max Operating Temperature=70°C, Min Operating Temperature=-20°C, Supplier Part Number 1=US3200005ZCT-ND, Category=Crystals, ComponentLink1Description=https://datasheet.ciiva.com:443/pdfs/VipMasterIC/IC/DIOD/DIOD-S-A0002236499/DIOD-S-A0002236499-1.pdf?src-supplier=IHS+Markit, ComponentLink1URL=https://datasheet.ciiva.com:443/pdfs/VipMasterIC/IC/DIOD/DIOD-S-A0002236499/DIOD-S-A0002236499-1.pdf?src-supplier=IHS+Markit, ComponentLink2Description=https://media.digikey.com/pdf/Data%20Sheets/Pericom%20PDFs/US3200005Z_Ver.A.pdf?src-supplier=Digi-Key, ComponentLink2URL=https://media.digikey.com/pdf/Data%20Sheets/Pericom%20PDFs/US3200005Z_Ver.A.pdf?src-supplier=Digi-Key, Frequency=32MHz, Frequency Tolerance=10ppm, Height=0.014inch, Length=0.063inch, Mount="Surface Mount", Packaging="Tape and Reel", Pricing 1="1=1.45000, 10=1.38400, 50=1.35200, 100=1.15880, 500=1.12666, 1000=0.94961 (USD)", RoHS=Yes, Supplier 1=Digi-Key, Width=0.047inch
X2: library part CRYSTAL_32K768, "Parallel - Fundamental Quartz Crystal, 0.032768MHz Nom", Case/Package=SMD/SMT, ESR (Equivalent Series Resistance)=90kR, Frequency=32.768kHz, Frequency Tolerance=20ppm, Load Capacitance=9pF, Manufacturer="ECS International", Manufacturer Part Number=ECS-.327-9-1210-TR, Max Operating Temperature=85°C, Min Operating Temperature=-40°C, Supplier Part Number 1=XC2283CT-ND, Category="Crystals and Oscillators", ComponentLink1Description=https://datasheet.ciiva.com:443/pdfs/VipMasterIC/IC/ECSI/ECSI-S-A0009254912/ECSI-S-A0009254912-1.pdf?src-supplier=IHS+Markit, ComponentLink1URL=https://datasheet.ciiva.com:443/pdfs/VipMasterIC/IC/ECSI/ECSI-S-A0009254912/ECSI-S-A0009254912-1.pdf?src-supplier=IHS+Markit, ComponentLink2Description=https://www.ecsxtal.com/store/pdf/ECX-1210.pdf?src-supplier=Digi-Key, ComponentLink2URL=https://www.ecsxtal.com/store/pdf/ECX-1210.pdf?src-supplier=Digi-Key, Mount="Surface Mount", Packaging="Tape and Reel", Pricing 1="1=1.52000, 10=1.45400, 50=1.42060, 100=1.21770, 500=1.18388, 1000=0.99784, 2500=0.94710 (USD)", RoHS=No, Stock 1=5205, Supplier 1=Digi-Key

## Via types
v1: diameter 0.635, hole 0.305, Top Layer to Bottom Layer, 112 vias
v2: diameter 0.635, hole 0.305, Top Layer to Bottom Layer, tented top, 1 vias

## Nets (pads, with @x,y where several pads share a name; then routed paths per layer and width w, separated by ;. In a path a pad name is that pad's centre, name@x,y a point inside that pad or via, vN(x,y) a via of type N, cw(c..) or ccw(c..) an arc to the next point about the centre after c; other vN are vias at no path point)
\H\E\_\E\N\: U5.6 U6.1 U8.2 | length 27.3
  Top Layer w0.152: U5.6@4.572,22.982 4.572,23.876 5.283,24.587 8.179,24.587 10.211,22.555 11.887,22.555 12.649,23.317 14.021,23.317 14.986,22.352 19.304,22.352 20.32,21.336 U8.2@20.32,18.796 20.32,14.732 20.679,14.373 U6.1@21.91,14.373
BLE_ANT: C30.1 U1.30 | length 7.7
  Top Layer w0.152: 12.446,10.16 12.522,10.236 U1.30@14.732,10.236
  Top Layer w0.991: C30.1@7.112,10.16 12.446,10.16
CAP_S1: TP3.1 U3.2 | length 5.9
  Top Layer w0.152: U3.2@50.292,30.234 50.3,30.226 51.308,30.226 51.562,29.972 51.562,28.194 52.578,27.178 TP3.1@53.848,27.178
CAP_S2: TP5.1 U3.3 | length 3.6
  Top Layer w0.152: U3.3@50.292,30.734 TP5.1@53.848,30.734
CAP_S3: TP6.1 U3.4 | length 6
  Top Layer w0.152: U3.4@50.292,31.234 51.046,31.234 51.562,31.75 51.562,33.782 52.07,34.29 TP6.1@53.848,34.29
CHG_N: D1.K U16.7 | length 4.8
  Top Layer w0.152: U16.7@13.972,26.964 13.248,26.964 12.7,26.416 12.7,24.892 13.208,24.384 D1.K@14.29,24.384
DEC4: C25.2 L2.1 U1.46 | length 5.7
  Top Layer w0.152: C25.2@17.78,2.54 L2.1@18.796,2.54 18.796,4.572 19.082,4.858 U1.46@19.082,7.086
ENABLE_LDO: R18.1 U4.B1 U5.4 | length 3.7
  Top Layer w0.152: U5.4@4.572,21.082 R18.1@5.842,21.082 7.62,21.082 7.874,21.336 U4.B1@7.874,21.598
GND: C1.2 C2.1 C16.2 C17.2 C18.2 C19.1 C20.1 C21.1 C22.2 C23.2 C24.2 C25.1 C26.2 C27.2 C28.2 C29.1 C31.2 C32.2 C33.2 C34.2 C35.2 C36.1 C37.1 C38.2 C39.1 C40.2 C41.1 C57.1 C59.2 C60.2 C61.2 C62.2 C63.2 C64.2 C65.2 C69.2 C70.2 C71.2 C72.2 J1.5 J4.2 L5.1 R8.1 R9.1 R11.1 R12.2 R14.2 R15.1 R18.2 R23.2 R35.2 TP2.1 TP3.2 TP4.1 TP5.2 TP6.2 TP7.1 TP8.1 TP9.1 TP25.1 TP37.2 TP45.1 U1.31 U1.45 U1.49 U2.2 U2.4 U2.7 U3.1 U3.6 U3.7 U4.B2 U5.2 U5.3 U6.3 U8.3 U9.C2 U16.1 U16.9 U16.10 U16.11 U16.20 U16.21 U18.1 U18.4 U19.2 U20.2 U20.6 U23.14 U23.15 U23.16 U24.2 U24.6 X1.2 X1.4 | length 37.7
  Top Layer w0.152: v1(5.588,23.876) 5.588,23.818 5.842,23.564 C37.1@5.842,23.098 C35.2@6.858,23.098 ; U9.C2@6.277,27.163 6.277,27.153 6.515,26.915 R11.1@6.515,25.931 ; U4.B2@8.374,21.598 8.382,21.59 8.382,19.812 9.128,19.066 C32.2@10.414,19.066 C33.2@11.43,19.066 C36.1@12.446,19.066 ; X1.2@11.214,4.302 11.414,4.502 C22.2@11.414,5.572 ; U16.9@13.972,25.964 14.055,25.964 14.099,25.92 14.099,25.673 14.188,25.584 14.852,25.584 U16.10@14.872,25.564 14.872,27.341 15.114,27.583 v1(15.114,27.714) 15.114,27.845 14.872,28.087 U16.1@14.872,29.864 ; U1.31@14.732,9.836 U1.49@17.482,9.836 ; v1(15.622,28.989) 15.655,28.956 16.256,28.956 16.372,29.072 U16.20@16.372,29.864 ; v1(16.13,27.714) 16.13,27.583 16.372,27.341 U16.11@16.372,25.564 ; U1.49@16.682,11.036 17.132,10.586 v1(17.682,10.036) 18.682,9.036 U1.45@18.682,7.086 ; C25.1@17.611,1.709 C25.1@17.78,1.54 ; v1(20.828,13.462) 20.959,13.462 21.213,13.208 R15.1@21.852,13.208 ; U20.2@26.858,14.986 26.908,15.036 C64.2@26.908,16.51 C65.2@26.908,17.526 ; C70.2@28.702,6.874 28.752,6.924 U24.6@31.058,6.924 ; U19.2@32.766,14.798 33.986,14.798 R35.2@34.036,14.748 ; U18.4@41.432,5.764 41.51,5.842 42.418,5.842 42.942,5.318 C59.2@43.434,5.318
  other v1: 4.572,1.27 13.462,1.27 22.098,1.524 29.21,1.524 16.51,2.032 46.99,2.032 4.572,2.794 8.89,3.302 25.034,3.769 37.846,3.81 4.572,4.572 13.716,4.572 27.178,4.826 4.572,6.096 22.352,6.858 12.446,7.366 45.974,7.366 5.588,7.874 16.412,8.512 17.682,8.512 18.952,8.512 6.35,8.89 7.366,8.89 8.636,8.89 16.412,10.036 18.952,10.036 22.86,10.16 1.016,11.43 16.412,11.56 17.682,11.56 18.952,11.56 4.826,11.684 7.366,11.684 9.398,11.684 11.938,11.938 2.286,12.446 4.064,12.446 24.384,12.446 17.78,14.732 24.892,16.51 19.558,17.272 12.192,18.034 1.778,19.558 4.318,19.812 16.51,21.082 21.082,21.336 24.638,22.098 42.926,23.114 15.748,23.368 22.86,24.13 10.922,24.892 50.038,24.892 15.622,26.439 22.352,27.432 8.636,30.988 6.35,32.512 8.89,32.766 44.45,34.036 9.144,34.544 7.112,34.798 50.8,35.052 14.986,35.306 47.498,36.068 23.876,36.576
LED_BLE: D4.K U1.14 | length 8.6
  Top Layer w0.152: D4.K@13.962,17.018 17.78,17.018 19.482,15.316 U1.14@19.482,12.986
LED_IND: D2.K U1.15 | length 7.6
  Top Layer w0.152: D2.K@13.97,15.748 18.542,15.748 19.082,15.208 U1.15@19.082,12.986
MCU_ENABLE_LDO: R15.2 U1.12 U6.2 | length 4.2
  Top Layer w0.152: U1.12@20.632,12.236 22.65,12.236 22.852,12.438 R15.2@22.852,13.208 ; R15.2@22.86,13.208 U6.2@22.86,14.373
NetC2_2: C2.2 U1.3 X2.1 | length 6.2
  Top Layer w0.152: U1.3@20.632,8.636 23.114,8.636 23.368,8.89 X2.1@25.146,8.89 25.244,8.988 C2.2@26.67,8.988
NetC3_1: C3.1 C6.1 C7.1 C8.2 C9.1 C11.1 C12.1 C13.2 C14.2 C15.2 U16.2 | length 26.5
  Top Layer w0.152: C6.1@8.89,26.162 v1@8.89,27.428 ; C9.1@8.898,28.702 8.89,28.694 v1@8.89,27.428 ; C3.1@10.16,27.432 v1(8.894,27.432) v1@8.89,27.428 ; C15.2@10.668,34.528 C14.2@12.192,34.528 14.748,34.528 15.208,34.068 C8.2@15.208,33.528 C13.2@15.208,32.004 ; U16.2@13.972,29.464 13.972,30.228 v1(14.59,30.846) 15.208,31.464 C13.2@15.208,32.004 ; C7.1@16.24,35.052 C12.1@16.24,33.528 ; C7.1@16.24,35.06 C7.1@16.248,35.052 ; C12.1@16.248,33.528 C12.1@16.24,33.528 ; C13.2@15.208,32.004 C11.1@16.256,32.004 16.24,32.02 C12.1@16.24,33.528
  Bottom Layer w0.152: v1(8.894,27.432) 12.446,27.432 12.7,27.686 12.7,30.48 13.066,30.846 v1(14.59,30.846)
NetC3_2: C3.2 U16.5 | length 3
  Top Layer w0.152: C3.2@11.16,27.432 12.192,27.432 12.724,27.964 U16.5@13.972,27.964
NetC4_1: C4.1 C5.1 C7.2 C10.1 C11.2 C12.2 L1.1 U16.19 | length 28.5
  Top Layer w0.152: L1.1@2.032,35.674 2.286,35.928 16.904,35.928 17.24,35.592 C7.2@17.24,35.052 ; C7.2@17.256,35.052 C11.2@17.256,32.004 17.272,31.988 U16.19@17.272,29.464 17.78,29.464 18.034,29.718 18.034,30.988 18.542,31.496 C4.1@19.558,31.496 C5.1@22.606,31.496 ; C5.1@22.606,31.48 C5.1@22.622,31.496
NetC4_2: C4.2 U16.17 | length 4
  Top Layer w0.152: U16.17@17.272,28.464 19.066,28.464 19.558,28.956 C4.2@19.558,30.496
NetC5_2: C5.2 U16.15 | length 7.3
  Top Layer w0.152: U16.15@17.272,27.464 20.86,27.464 22.606,29.21 C5.2@22.606,30.48
NetC6_2: C6.2 U16.6 | length 4.6
  Top Layer w0.152: C6.2@9.906,26.146 C6.2@9.89,26.162 11.684,26.162 12.986,27.464 U16.6@13.972,27.464
NetC8_1: C8.1 C13.1 C14.1 C15.1 L1.2 | length 13.8
  Top Layer w0.152: L1.2@2.032,33.274 2.286,33.528 C15.1@10.668,33.528 C14.1@12.192,33.528 C8.1@14.208,33.528 C13.1@14.208,32.004
NetC9_2: C9.2 U16.3 | length 4.9
  Top Layer w0.152: C9.2@9.898,28.702 9.898,29.202 10.16,29.464 12.192,29.464 12.692,28.964 U16.3@13.972,28.964
NetC10_2: C10.2 U16.16 | length 5.6
  Top Layer w0.152: U16.16@17.272,27.964 19.836,27.964 21.082,29.21 C10.2@21.082,30.48
NetC16_1: C16.1 C17.1 C18.1 U16.18 | length 13.3
  Top Layer w0.152: U16.18@17.272,28.964 18.55,28.964 18.796,29.21 v1(18.796,29.718) ; v1(18.288,36.068) C18.1@19.812,36.068 C17.1@19.812,34.544 C16.1@19.812,33.02
  Bottom Layer w0.152: v1(18.288,36.068) 18.288,31.75 18.796,31.242 v1(18.796,29.718)
NetC19_2: C19.2 U1.2 X2.2 | length 6.1
  Top Layer w0.152: U1.2@20.632,8.236 23.26,8.236 23.368,8.128 25.088,8.128 X2.2@25.146,8.07 26.572,8.07 C19.2@26.67,7.972
NetC22_1: C22.1 U1.34 X1.3 | length 7.9
  Top Layer w0.152: X1.3@10.414,4.302 C22.1@10.414,5.572 10.414,7.366 11.684,8.636 U1.34@14.732,8.636
NetC23_1: C23.1 U1.35 X1.1 | length 8.9
  Top Layer w0.152: C23.1@11.176,1.762 11.176,3.264 X1.1@11.214,3.302 11.938,3.302 12.208,3.572 12.208,4.842 13.462,6.096 13.462,7.874 13.824,8.236 U1.35@14.732,8.236
NetC24_1: C24.1 U1.1 | length 3.9
  Top Layer w0.152: U1.1@20.632,7.836 22.644,7.836 23.622,6.858 C24.1@24.13,6.858
NetC26_1: C26.1 U1.32 | length 7.2
  Top Layer w0.152: C26.1@8.382,7.35 10.43,9.398 14.306,9.398 14.344,9.436 U1.32@14.732,9.436
NetC27_1: C27.1 U1.33 | length 6.8
  Top Layer w0.152: C27.1@9.398,6.842 9.398,7.366 11.068,9.036 U1.33@14.732,9.036 ; C27.1@9.398,6.85 C27.1@9.544,6.996
NetC30_2: C30.2 C31.1 L4.1 L5.2 | length 3.6
  Top Layer w0.152: L4.1@2.032,10.144 L4.1@2.048,10.16
  Top Layer w0.991: L4.1@2.048,10.16 C30.2@5.588,10.16
NetC32_1: C32.1 C33.1 C36.2 L6.1 U4.A2 | length 6.7
  Top Layer w0.152: U4.A2@8.374,22.098 8.89,22.098 9.144,21.844 9.144,20.574 9.652,20.066 C32.1@10.414,20.066 C33.1@11.43,20.066 C36.2@12.446,20.066 L6.1@13.462,20.066
NetC57_2: C57.2 C58.1 R36.2 U18.2 | length 5
  Top Layer w0.152: U18.2@40.132,5.764 40.132,4.826 41.22,3.738 41.22,3.484 C57.2@41.402,3.302 ; R36.2@41.402,2.286 C57.2@41.402,3.302 ; C58.1@42.434,3.302 C57.2@41.402,3.302
NetC58_2: C58.2 C59.1 R37.2 U18.3 | length 5.9
  Top Layer w0.152: U18.3@40.782,5.764 40.782,4.684 41.148,4.318 C59.1@43.434,4.318 ; C58.2@43.434,3.302 C59.1@43.434,4.318 ; R37.2@44.45,4.318 C59.1@43.434,4.318
NetD1_A: D1.A R6.1 | length 1
  Top Layer w0.152: D1.A@15.24,24.384 R6.1@16.256,24.384
NetD2_A: D2.A R4.2 | length 1.9
  Top Layer w0.152: R4.2@11.16,15.748 D2.A@13.02,15.748
NetD4_A: D4.A R16.2 | length 1.9
  Top Layer w0.152: R16.2@11.16,17.018 D4.A@13.012,17.018
NetE1_1: E1.1 L4.2 | length 3
  Top Layer w0.991: E1.1@2.032,5.588 L4.2@2.032,8.636
NetL2_2: L2.2 L3.1 | length 1.5
  Top Layer w0.152: L2.2@18.796,1.54 18.812,1.524 L3.1@20.32,1.524
NetL3_2: L3.2 U1.47 | length 4.4
  Top Layer w0.152: U1.47@19.482,7.086 19.482,5.156 20.32,4.318 L3.2@20.32,3.048
NetR8_2: R8.2 U9.B1 | length 1.4
  Top Layer w0.152: R8.2@4.499,27.455 4.607,27.563 U9.B1@5.857,27.563
NetR9_2: R9.2 U9.B2 | length 1.3
  Top Layer w0.152: U9.B2@6.277,27.563 7.439,27.563 R9.2@7.547,27.455
NetR11_2: R11.2 U9.C1 | length 1.5
  Top Layer w0.152: R11.2@5.515,25.931 5.515,27.089 5.604,27.178 5.842,27.178 U9.C1@5.857,27.163
NetR12_1: R12.1 R13.2 U16.13 | length 4.4
  Top Layer w0.152: U16.13@17.272,26.464 17.986,26.464 18.796,25.654 R12.1@21.336,25.654
NetR13_1: R13.1 U16.14 | length 2.9